# Altium PCB BOTTOM_BOARD_TRANS.PcbDoc
Units mm, origin at the board's own origin, x right, y up, seen from the top; angles counter-clockwise.
Board outline 102 x 86 mm, 2 copper layers (Top Layer, Bottom Layer), stack 1.071 mm thick; 26 components, 14 nets, 70 pads, 2 vias.
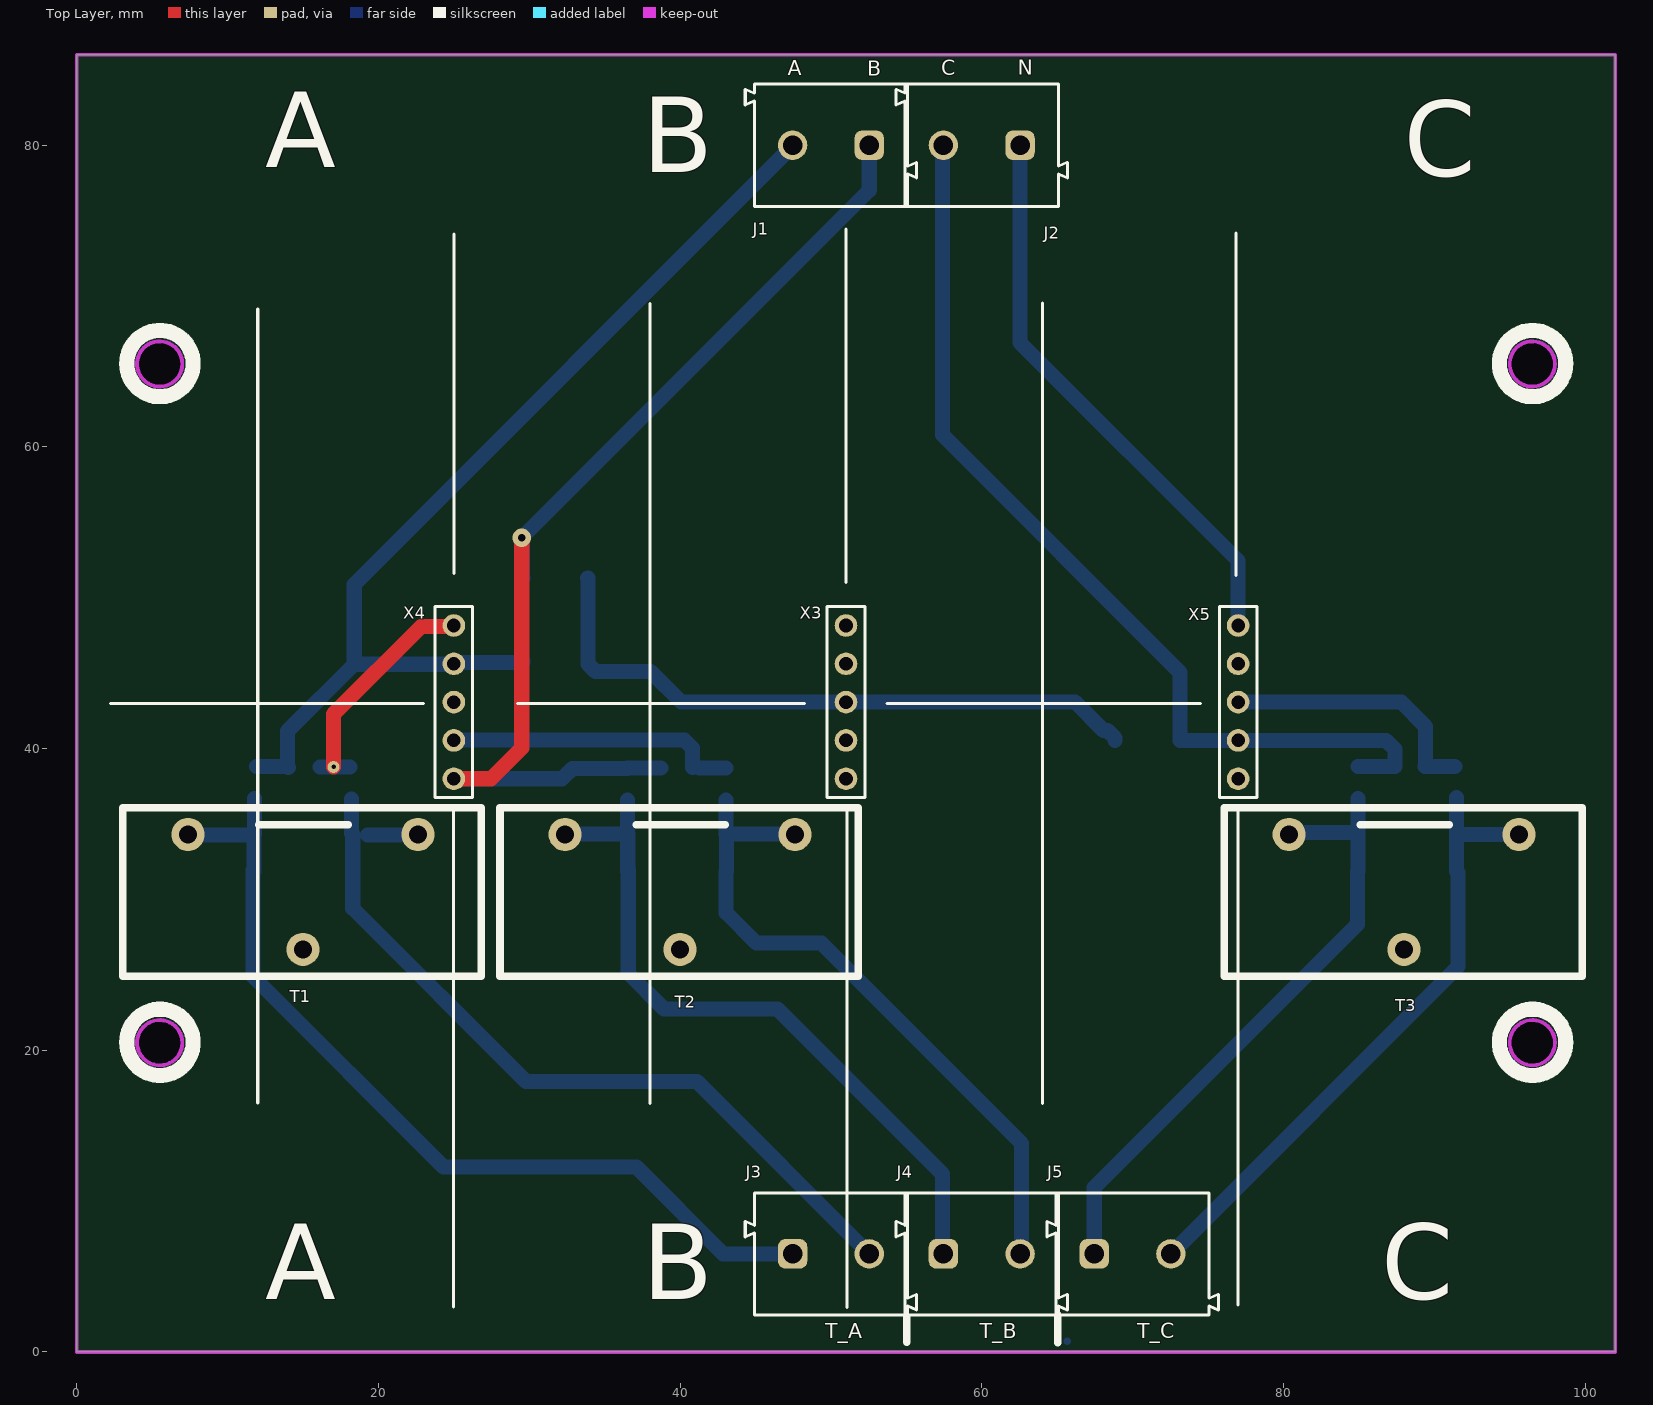
[diagram p0: Top Layer view]
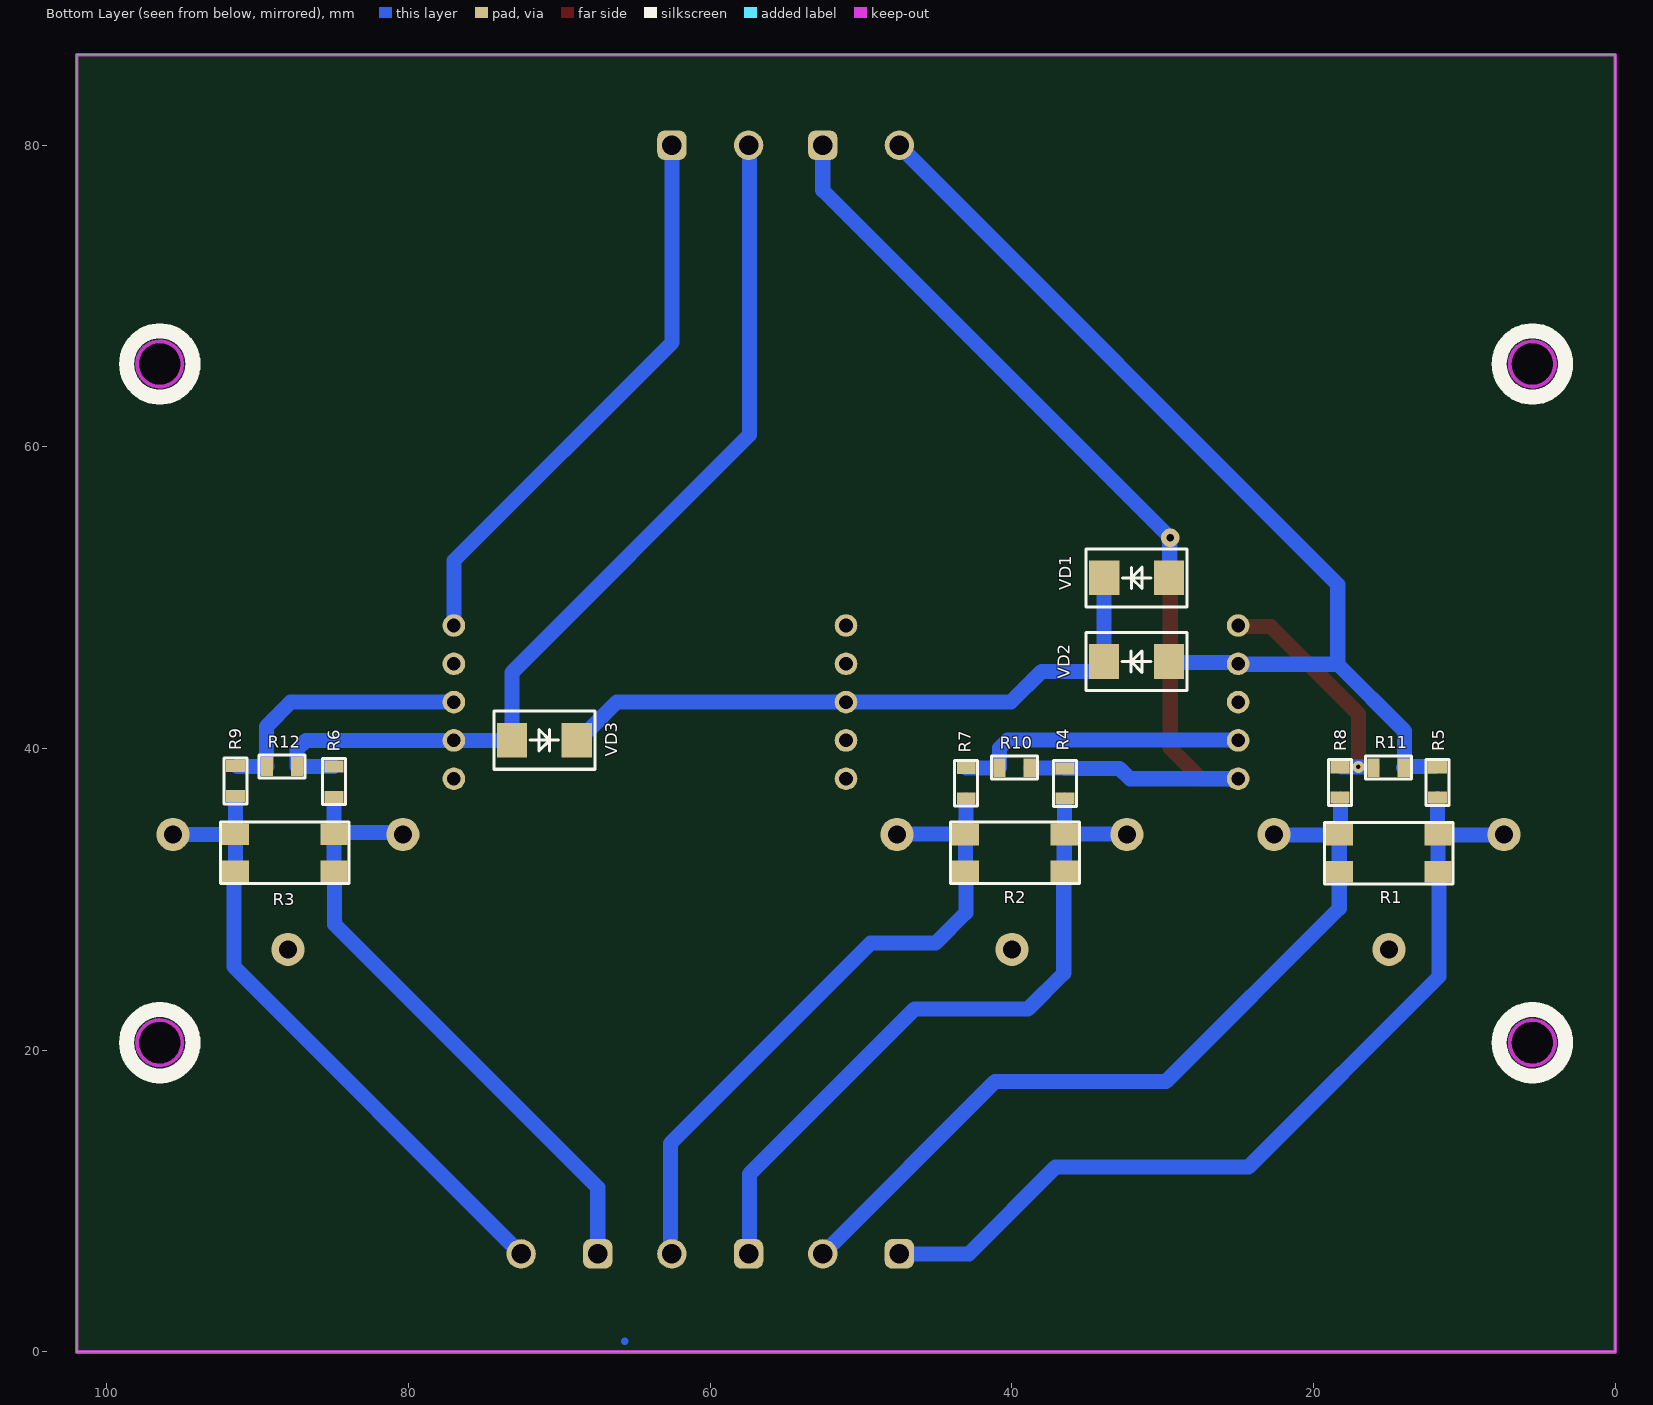
[diagram p1: Bottom Layer view, seen from below]
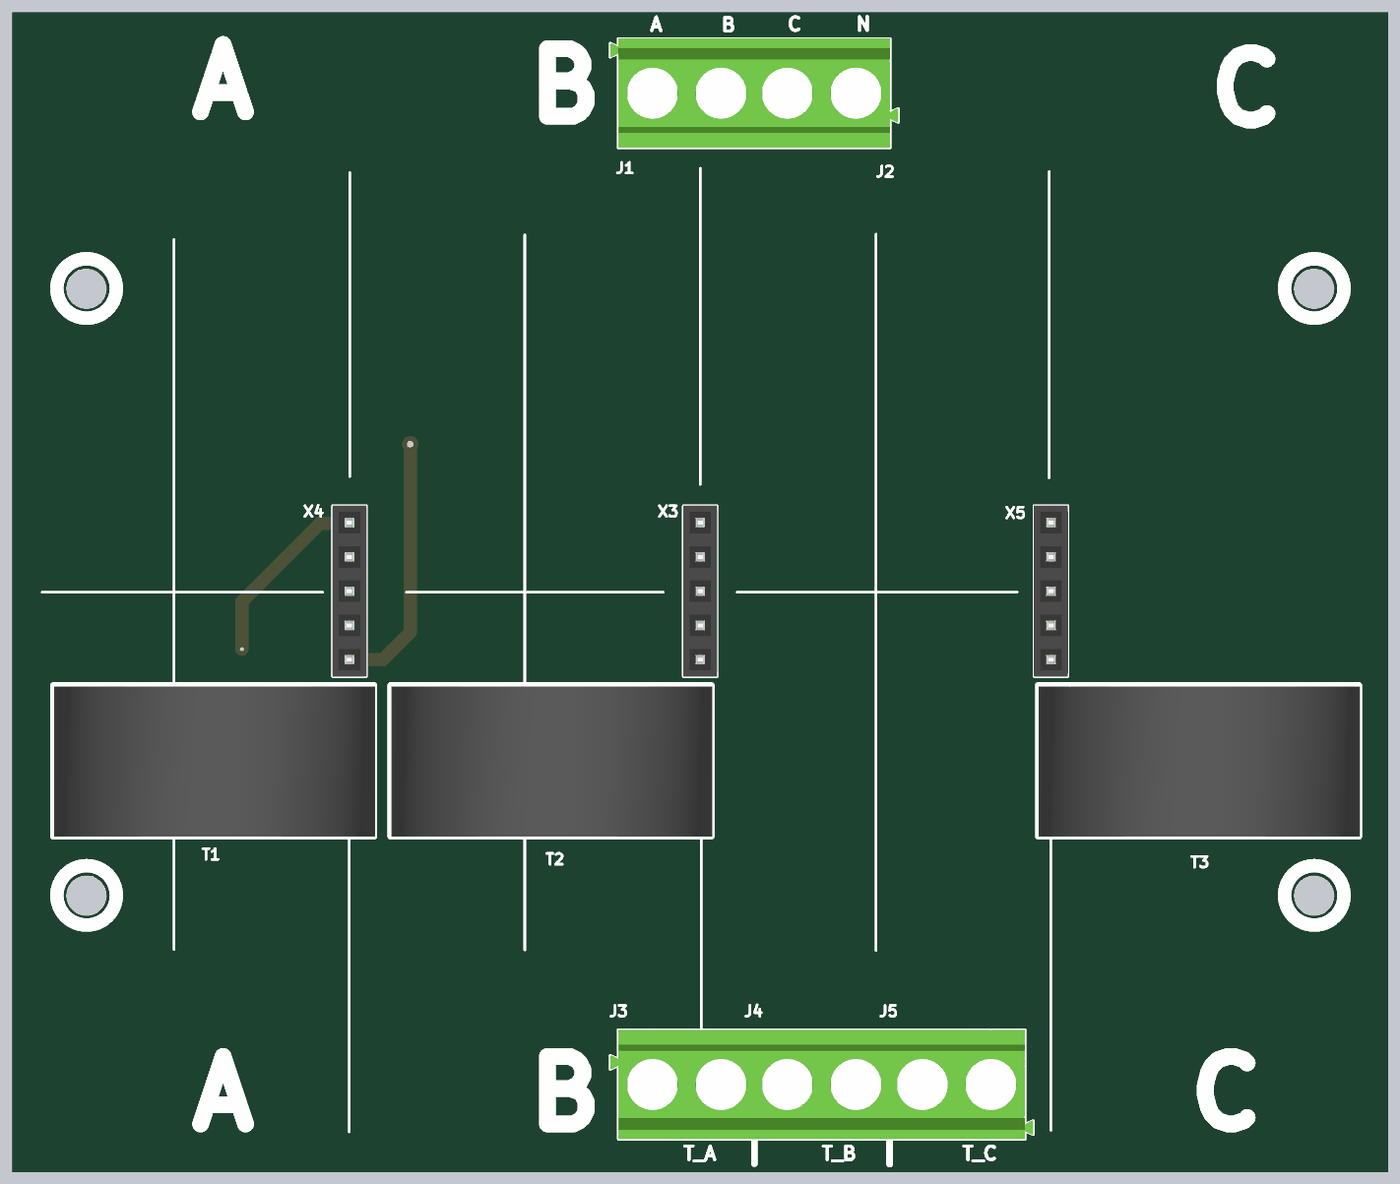
[diagram p2: 3D render of the assembled board from above, using the file's embedded part models]
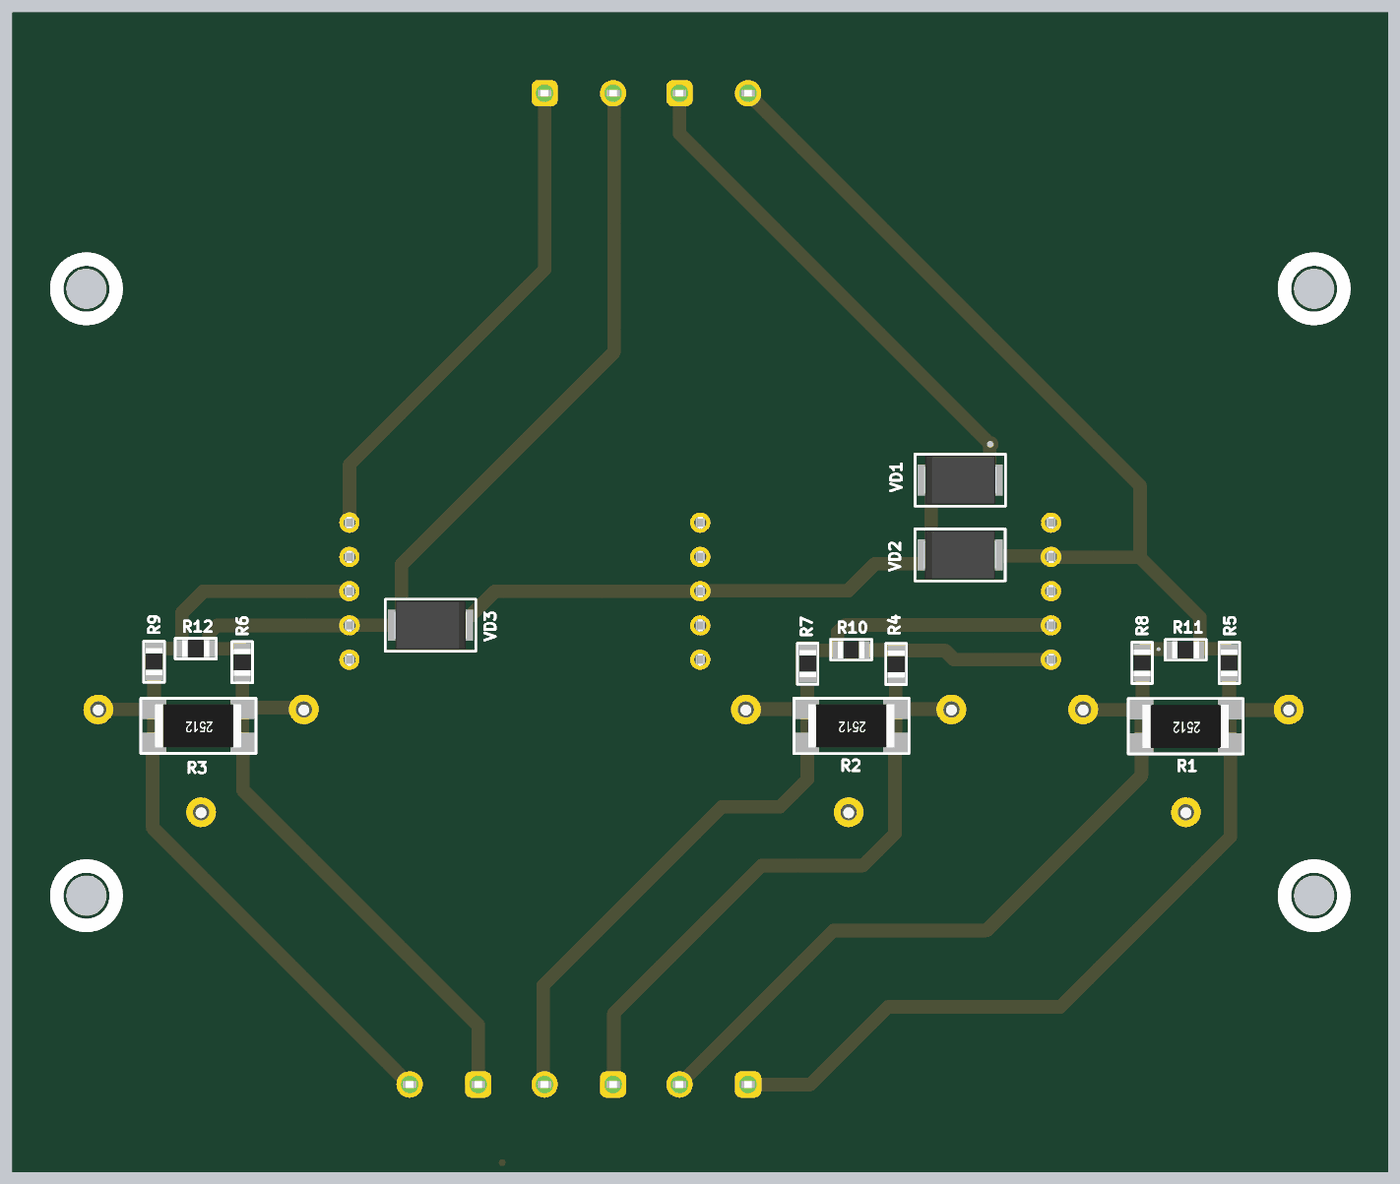
[diagram p3: 3D render of the assembled board from below, using the file's embedded part models]

## Layer stack, top to bottom
Top Solder: solder mask 0.0102, Solder Resist, Dk 3.5
Top Layer: signal copper 0.0356
Dielectric 1: dielectric 1, FR-4, Dk 4.8
Bottom Layer: signal copper 0.0356
Bottom Solder: solder mask 0.0102, Solder Resist, Dk 3.5

## Board outline
0,0 0,86 102,86 102,0
cut-out: 95,65.5 ccw(c96.5,65.5) 96.5,64 ccw(c96.5,65.5) 98,65.5 ccw(c96.5,65.5) 96.5,67 ccw(c96.5,65.5)
cut-out: 95,20.5 ccw(c96.5,20.5) 96.5,19 ccw(c96.5,20.5) 98,20.5 ccw(c96.5,20.5) 96.5,22 ccw(c96.5,20.5)
cut-out: 4,20.5 ccw(c5.5,20.5) 5.5,19 ccw(c5.5,20.5) 7,20.5 ccw(c5.5,20.5) 5.5,22 ccw(c5.5,20.5)
cut-out: 4,65.5 ccw(c5.5,65.5) 5.5,64 ccw(c5.5,65.5) 7,65.5 ccw(c5.5,65.5) 5.5,67 ccw(c5.5,65.5)

## Design rules (kind name [scope] priority, off if disabled: settings)
Clearance [All] p1: gap=0.2 ignorepadtopadclearanceinfootprint=FALSE
ComponentClearance [All] p1: gap=-1 collisioncheckmode=3 verticalgap=0.254 showdistances=FALSE
DiffPairsRouting [All] p1: maxlimit=0.254 minlimit=0.254 mostfreqgap=0.254 substack1={A23D90DD-733B-49C5-8102-56B3D284E3A0} toplayer_{a23d90dd-733b-49c5-8102-56b3d284e3a0}_minwidth=0.381 toplayer_{a23d90dd-733b-49c5-8102-56b3d284e3a0}_maxwidth=0.381 toplayer_{a23d90dd-733b-49c5-8102-56b3d284e3a0}_prefwidth=0.381 bottomlayer_{a23d90dd-733b-49c5-8102-56b3d284e3a0}_minwidth=0.381 bottomlayer_{a23d90dd-733b-49c5-8102-56b3d284e3a0}_maxwidth=0.381 bottomlayer_{a23d90dd-733b-49c5-8102-56b3d284e3a0}_prefwidth=0.381 toplayer_minwidth=0.381 toplayer_maxwidth=0.381 toplayer_prefwidth=0.381 bottomlayer_minwidth=0.381 bottomlayer_maxwidth=0.381 bottomlayer_prefwidth=0.381 substack2={0B3DB408-A969-412D-8C07-BA8AE97219D9} toplayer_{0b3db408-a969-412d-8c07-ba8ae97219d9}_minwidth=0.381 toplayer_{0b3db408-a969-412d-8c07-ba8ae97219d9}_maxwidth=0.381 toplayer_{0b3db408-a969-412d-8c07-ba8ae97219d9}_prefwidth=0.381 bottomlayer_{0b3db408-a969-412d-8c07-ba8ae97219d9}_minwidth=0.381 bottomlayer_{0b3db408-a969-412d-8c07-ba8ae97219d9}_maxwidth=0.381 bottomlayer_{0b3db408-a969-412d-8c07-ba8ae97219d9}_prefwidth=0.381 substack3={378827E6-B38F-4565-9D2F-710D8D441C30} toplayer_{378827e6-b38f-4565-9d2f-710d8d441c30}_minwidth=0.381 toplayer_{378827e6-b38f-4565-9d2f-710d8d441c30}_maxwidth=0.381 toplayer_{378827e6-b38f-4565-9d2f-710d8d441c30}_prefwidth=0.381 bottomlayer_{378827e6-b38f-4565-9d2f-710d8d441c30}_minwidth=0.381 bottomlayer_{378827e6-b38f-4565-9d2f-710d8d441c30}_maxwidth=0.381 bottomlayer_{378827e6-b38f-4565-9d2f-710d8d441c30}_prefwidth=0.381 substack4={1E65D4A7-266F-4925-B814-5E9C4A66F8EE} toplayer_{1e65d4a7-266f-4925-b814-5e9c4a66f8ee}_minwidth=0.381 toplayer_{1e65d4a7-266f-4925-b814-5e9c4a66f8ee}_maxwidth=0.381 toplayer_{1e65d4a7-266f-4925-b814-5e9c4a66f8ee}_prefwidth=0.381 bottomlayer_{1e65d4a7-266f-4925-b814-5e9c4a66f8ee}_minwidth=0.381 bottomlayer_{1e65d4a7-266f-4925-b814-5e9c4a66f8ee}_maxwidth=0.381 bottomlayer_{1e65d4a7-266f-4925-b814-5e9c4a66f8ee}_prefwidth=0.381 substack5={93C5D03E-862D-45F8-9871-970EEA9B3F11} toplayer_{93c5d03e-862d-45f8-9871-970eea9b3f11}_minwidth=0.381 toplayer_{93c5d03e-862d-45f8-9871-970eea9b3f11}_maxwidth=0.381 toplayer_{93c5d03e-862d-45f8-9871-970eea9b3f11}_prefwidth=0.381 bottomlayer_{93c5d03e-862d-45f8-9871-970eea9b3f11}_minwidth=0.381 bottomlayer_{93c5d03e-862d-45f8-9871-970eea9b3f11}_maxwidth=0.381 bottomlayer_{93c5d03e-862d-45f8-9871-970eea9b3f11}_prefwidth=0.381 maxuncoupledlength=12.7
Height [All] p1: minheight=-10 maxheight=80 prefheight=40
HoleSize [All] p1: absolutevalues=TRUE maxlimit=6 minlimit=0.01 maxpercent=80.000 minpercent=20.000
HoleToHoleClearance [All] p1: gap=0.1 allowstackedmicrovias=TRUE
MinimumSolderMaskSliver [All] p1: minsoldermaskwidth=0.1
PlaneConnect [All] p1: pad.planeconnectstyle=Relief pad.reliefexpansion=0.5 pad.reliefentries=4 pad.reliefconductorwidth=0.5 pad.reliefairgap=0.15 via.planeconnectstyle=Direct via.reliefexpansion=0.5 via.reliefentries=4 via.reliefconductorwidth=0.5 via.reliefairgap=0.15
PolygonConnect VQFN20 [HasFootprint('VQFN20')] p1: connectstyle=Direct reliefconductorwidth=0.254 reliefentries=4 polygonreliefangle="90 Angle" airgapwidth=0.254
PolygonConnect [All] p2: thpad.connectstyle=Relief thpad.reliefconductorwidth=0.3 thpad.reliefentries=4 thpad.polygonreliefangle="90 Angle" thpad.airgapwidth=0.15 smdpad.connectstyle=Relief smdpad.reliefconductorwidth=0.3 smdpad.reliefentries=4 smdpad.polygonreliefangle="90 Angle" smdpad.airgapwidth=0.15 via.connectstyle=Direct via.reliefconductorwidth=0.3 via.reliefentries=4 via.polygonreliefangle="90 Angle" via.airgapwidth=0.15
RoutingVias [All] p1: holewidth=0.1 width=0.1 viastyle="Through Hole" minholewidth=0 minwidth=0.3 maxholewidth=2 maxwidth=4
ShortCircuit [All] p1: allowed=TRUE
SilkToSolderMaskClearance [IsPad] p1: minsilkscreentomaskgap=0.1 clearancetoexposedcopper=TRUE
SolderMaskExpansion SolderMaskExpansion_Via [IsVia] p1: expansion=0.102 istentingtop=TRUE
SolderMaskExpansion [All] p2: expansion=0.01 istentingtop=FALSE
UnRoutedNet [All] p1: checkbadconnections=TRUE
Width [All] p1: maxlimit=5 minlimit=0.2 preferedwidth=0.3 substack1={A23D90DD-733B-49C5-8102-56B3D284E3A0} substack2={0B3DB408-A969-412D-8C07-BA8AE97219D9} substack3={378827E6-B38F-4565-9D2F-710D8D441C30} substack4={1E65D4A7-266F-4925-B814-5E9C4A66F8EE} substack5={93C5D03E-862D-45F8-9871-970EEA9B3F11}
20 further rules are at their usual default settings.

## Components (designator, comment, footprint, x,y, rotation, side; value= is the part's Value field where it differs from the comment)
J1 "691213510002" 691213510002 50,80 r180 top locked
J2 "691213510002" 691213510002 60,80 r180 top locked
J3 "691213510002" 691213510002 50,6.5 r0 top locked
J4 "691213510002" 691213510002 60,6.5 r0 top locked
J5 "691213510002" 691213510002 70,6.5 r0 top locked
R1 "100" RES-2512 15.021,33.063 r0 bottom locked
R2 "100" RES-2512 39.807,33.091 r0 bottom locked
R3 "100" RES-2512 88.211,33.092 r0 bottom locked
R4 "10K" RES-0805 36.48,37.682 r90 bottom
R5 "10K" RES-0805 11.782,37.764 r90 bottom
R6 "10K" RES-0805 84.951,37.803 r90 bottom
R7 "10K" RES-0805 43.032,37.702 r90 bottom
R8 "10K" RES-0805 18.248,37.764 r90 bottom
R9 "10K" RES-0805 91.486,37.847 r90 bottom
R10 "1K" RES-0805 39.816,38.734 r180 bottom
R11 "1K" RES-0805 15.021,38.734 r180 bottom
R12 "1K" RES-0805 88.391,38.82 r180 bottom
T1 "AC1005" AC1005 15,30.5 r0 top locked
T2 "AC1005" AC1005 40,30.5 r0 top locked
T3 "AC1005" AC1005 88,30.5 r0 top locked
VD1 "DIODE" DO-214BA 31.73,51.316 r180 bottom
VD2 "DIODE" DO-214BA 31.746,45.768 r180 bottom
VD3 "DIODE" DO-214BA 70.996,40.555 r0 bottom
X3 "CONN-5-PIN" CONN-PLS-5-2.54mm 51,38 r90 top locked
X4 "CONN-5-PIN" CONN-PLS-5-2.54mm 25,38 r90 top locked
X5 "CONN-5-PIN" CONN-PLS-5-2.54mm 77,38 r90 top locked

## Footprints (in the part's own frame and the unit in brackets; to place one, negate y for a bottom-side part, rotate by r counter-clockwise, add the part's x,y. Pads: shape width x height; smd on the part's side, far side on the other; paste and mask are expansions set on the pad)
691213510002 [mm] "Serie 2135 - 5.08 mm _ 2 pins"
  rrect50% 1.95x1.95 hole 1.3: 1(-2.54,0)
  round 1.95 hole 1.3: 2(2.54,0)
  silkscreen extent -5.68,-4.05 5.68,4.05, body extent -5.68,-4.05 5.68,4.05, height 10.1
AC1005 [mm]
  round 2.2 hole 1.2: 1(-7.62,3.81) 2(7.62,3.81) 3(0,-3.81)
  silkscreen extent -11.94,-5.59 11.81,5.59, body extent -11.9,-5.6 11.9,5.52, height 23.9
CONN-PLS-5-2.54mm [mm]
  round 1.5 hole 0.9: 1(0,0) 2(2.54,0) 3(5.08,0) 4(7.62,0) 5(10.16,0)
  silkscreen extent -1.25,-1.25 11.41,1.25, body extent -1.27,-1.27 11.43,1.27, height 8.4
DO-214BA [mm]
  rect 2x2.3 smd: 1(-2.15,0) 2(2.15,0)
  silkscreen extent -3.35,-1.92 3.35,1.92, body extent -2.7,-1.81 2.7,1.81, height 3.3
RES-0805 [mm]
  rect 0.8x1.25 smd mask+0.015: 1(-1,0) 2(1,0)
  silkscreen extent -1.52,-0.76 1.52,0.76, body extent -1,-0.62 1,0.63, height 0.6
RES-2512 [mm]
  rect 1.8x1.45 smd: 1(-3.275,-1.225) 1(-3.275,1.225) 2(3.275,-1.225) 2(3.275,1.225)
  silkscreen extent -4.28,-2.05 4.25,2.05, body extent -3.2,-1.6 3.2,1.6, height 0.6

## Part data
J1 J2 J3 J4 J5: "WR-TBL Series 2135 Horizontal Entry Modular, THT, pitch 5.08mm, 2p", Manufacturer="Wurth Elektronik", Operating Temperature Max=120°C, Operating Temperature Min=-30°C, Rated Current=14A, Working Voltage=300V, Application="Rising Cage Clamp", Category="Terminal Blocks", ComponentLink1Description="Website Link", ComponentLink1URL=https://www.we-online.com/redexpert/article/691213510002?ad, ComponentLink2Description="Datasheet Link", ComponentLink2URL=https://www.we-online.com/redexpert/spec/691213510002?ad, Manufacturer Part Number=691213510002, Match Code=WR-TBL, Modularity=Yes, Mount="Through Hole", Number of Pins=2, Number of Rows=1, Orientation=Horizontal, Packaging=Box, Pitch=5.08mm
R1 R2 R3 R10 R11 R12: library part RES-CONST, "10K"
R4 R5 R6 R7 R8 R9: library part RES-CONST

## Via types
v1: diameter 1.2, hole 0.5, Top Layer to Bottom Layer, tented both sides, 1 vias
v2: diameter 0.8, hole 0.3, Top Layer to Bottom Layer, tented both sides, 1 vias

## Nets (pads, with @x,y where several pads share a name; then routed paths per layer and width w, separated by ;. In a path a pad name is that pad's centre, name@x,y a point inside that pad or via, vN(x,y) a via of type N, cw(c..) or ccw(c..) an arc to the next point about the centre after c; other vN are vias at no path point)
A_IN: J1.2 R5.2 R11.2 VD2.2 X4.4 | length 68.3
  Bottom Layer w1: R5.2@11.907,38.802 R11.2@13.921,38.802 ; R11.2@13.966,38.859 13.966,41.16 18.396,45.591 ; R11.2 R11.2@14.021,38.759 ; VD2.2 29.522,45.694 25.074,45.694 X4.4 24.971,45.591 18.396,45.591 ; J1.2@47.46,79.941 18.396,50.878 18.396,45.591
A_OUT: R8.2 R11.1 X4.5 | length 15.9
  Top Layer w1: v2(17.028,38.79) 17.028,42.294 22.837,48.103 24.943,48.103 X4.5
  Bottom Layer w1: R11.1@16.121,38.79 v2(17.028,38.79) R8.2@18.123,38.79
B_IN: J1.1 R4.2 R10.2 VD1.2 X4.1 | length 71.6
  Top Layer w1: X4.1 27.47,38 29.502,40.032 v1(29.502,53.977)
  Bottom Layer w1: X4.1 32.182,38 32.864,38.682 R4.2 36.506,38.708 R10.2@38.716,38.708 ; VD1.2 29.54,51.356 29.54,53.939 v1(29.502,53.977) 52.54,77.015 J1.1
B_OUT: R7.2 R10.1 X4.2 | length 19
  Bottom Layer w1: X4.2@25.03,40.57 40.234,40.57 ; 40.294,40.55 40.82,40.025 40.82,38.738 R10.1 ; 41.278,38.702 R7.2
C_IN: J2.2 R6.2 R12.2 VD3.2 X5.2 | length 64.1
  Top Layer w1: X5.2@76.993,40.548 X5.2
  Bottom Layer w1: J2.2@57.395,80.034 57.395,60.803 73.146,45.051 VD3.2 ; VD3.2@73.154,40.548 X5.2@76.993,40.548 ; X5.2 86.805,40.54 87.391,39.954 R12.2 87.382,38.811 84.96,38.811 R6.2
C_OUT: R9.2 R12.1 X5.3 | length 17.6
  Bottom Layer w1: X5.3 87.833,43.08 ; 87.812,43.08 89.419,41.473 R12.1@89.419,38.945 ; R12.1 R9.2@91.361,38.82
DC_HV: VD1.1 VD2.1 VD3.1 X3.3 | length 42.8
  Bottom Layer w1: VD1.1 33.888,51.309 33.888,45.775 VD2.1 33.896,45.618 34.396,45.118 38.035,45.118 40.053,43.1 X3.3@50.98,43.1 ; X3.3 66.195,43.08 68.07,41.205 68.346,41.205 68.846,40.705 VD3.1
NetJ3_1: J3.1 R1.1 R5.1 T1.1 | length 59.6
  Bottom Layer w1: T1.1@7.424,34.266 R1.1@11.724,34.266 ; R1.1@11.696,31.947 11.696,24.876 24.318,12.254 37.102,12.254 42.856,6.5 J3.1 ; R1.1@11.746,31.838 11.746,34.288 11.798,34.34 R5.1@11.798,36.682
NetJ3_2: J3.2 R1.2 R8.1 T1.2 | length 54.4
  Bottom Layer w1: R8.1@18.21,36.664 18.21,34.374 18.296,34.288 18.296,31.838 18.296,29.41 29.786,17.92 41.12,17.92 J3.2 ; 19.271,34.279 T1.2@22.62,34.279
NetJ4_1: J4.1 R2.1 R4.1 T2.1 | length 47.4
  Bottom Layer w1: T2.1@32.268,34.351 32.285,34.333 R2.1@36.514,34.333 ; R4.1@36.506,36.582 36.506,34.341 R2.1@36.514,34.333 ; R2.1@36.532,31.866 36.532,34.316 R2.1@36.514,34.333 ; R2.1@36.566,31.988 36.566,25.105 38.934,22.737 46.453,22.737 57.398,11.791 J4.1@57.398,6.562
NetJ4_2: J4.2 R2.2 R7.1 T2.2 | length 45.3
  Bottom Layer w1: R7.1@43.057,36.602 43.057,34.34 43.082,34.316 R2.2@43.082,31.866 ; R2.2@43.058,31.842 43.058,29.113 45.072,27.099 49.372,27.099 62.648,13.824 62.648,6.608 J4.2 ; R2.2@43.106,34.34 T2.2@47.59,34.34 ; T2.2@47.556,34.31 T2.2
NetJ5_1: J5.1 R3.1 R6.1 T3.1 | length 42.1
  Bottom Layer w1: J5.1 67.46,10.906 84.898,28.345 R3.1@84.898,31.867 ; T3.1 80.506,34.436 84.817,34.436 R3.1@84.937,34.317 ; R3.1@84.937,31.867 R3.1@84.937,34.317 ; R6.1@84.937,36.703 R3.1@84.937,34.317
NetJ5_2: J5.2 R3.2 R9.1 T3.2 | length 42.3
  Bottom Layer w1: J5.2 91.586,25.546 R3.2@91.586,31.78 ; R3.2@91.486,34.317 R9.1@91.486,36.747 ; R3.2@91.486,31.867 91.486,34.317 91.49,34.313 95.754,34.313 T3.2@95.758,34.31
NEUTRAL: J2.1 X5.5 | length 37.8
  Bottom Layer w1: J2.1 62.54,66.911 77,52.451 X5.5
pads on no net: T1.3 T2.3 T3.3 X3.1 X3.2 X3.4 X3.5 X4.3 X5.1 X5.4
copper on no net: | length 0

## Keep-outs
Keep-Out Layer:
  circle w0.254: c96.5,65.5 r1.5
  circle w0.254: c96.5,20.5 r1.5
  circle w0.254: c5.5,20.5 r1.5
  circle w0.254: c5.5,65.5 r1.5
  lines w0.254: 0,0 0,86 102,86 102,0.001 0,0

## Silkscreen, mask and mechanical layers (free items; w line width, h text height)
Top Overlay:
  circle w1: c96.516,65.525 r2.2
  circle w1: c5.516,65.525 r2.2
  circle w1: c5.516,20.525 r2.2
  circle w1: c96.516,20.525 r2.2
  lines w0.2: 2.235,43 23,43 ; 12,16.501 12,69.139 ; 24.977,2.992 24.977,36.117 ; 25.027,51.592 25.027,74.11 ; 29.235,43 48.239,43 ; 38,16.483 38,69.499 ; 51,51 51,74.431 ; 51.066,2.943 51.066,36.068 ; 53.735,43 74.5,43 ; 64.033,16.459 64.033,69.545 ; 76.861,51.492 76.861,74.19 ; 76.986,3.117 76.986,36.242
  lines w0.5: 55.014,0.635 55.014,2.294 ; 65.037,0.601 65.037,2.463
  text "N" at 62.401,84.661 h1
  text "A" at 47.14,84.638 h1
  text "C" at 57.313,84.652 h1
  text "B" at 52.425,84.6 h1
  text "A" at 12.5,78.54 h5
  text "B" at 37.5,78.216 h5
  text "C" at 87.972,77.935 h5
  text "A" at 12.5,3.5 h5
  text "B" at 37.5,3.5 h5
  text "C" at 86.5,3.5 h5
  text "T_A" at 49.616,0.921 h1
  text "T_B" at 59.865,0.921 h1
  text "T_C" at 70.297,0.921 h1
Bottom Overlay:
  circle w1: c96.496,65.499 r2.2
  circle w1: c5.496,65.499 r2.2
  circle w1: c5.496,20.499 r2.2
  circle w1: c96.496,20.499 r2.2